# Altium PCB YGL_Y1.PcbDoc (part 1 of 2)
Units mm, origin at the board's own origin, x right, y up, seen from the top; angles counter-clockwise.
Board outline 70 x 42.24 mm, 4 copper layers (Top Layer 1, layer1, layer2, Bottom Layer 1), stack 0.603 mm thick; 162 components, 114 nets, 466 pads, 244 vias.
Unrouted connection lines stored in the file: 91.
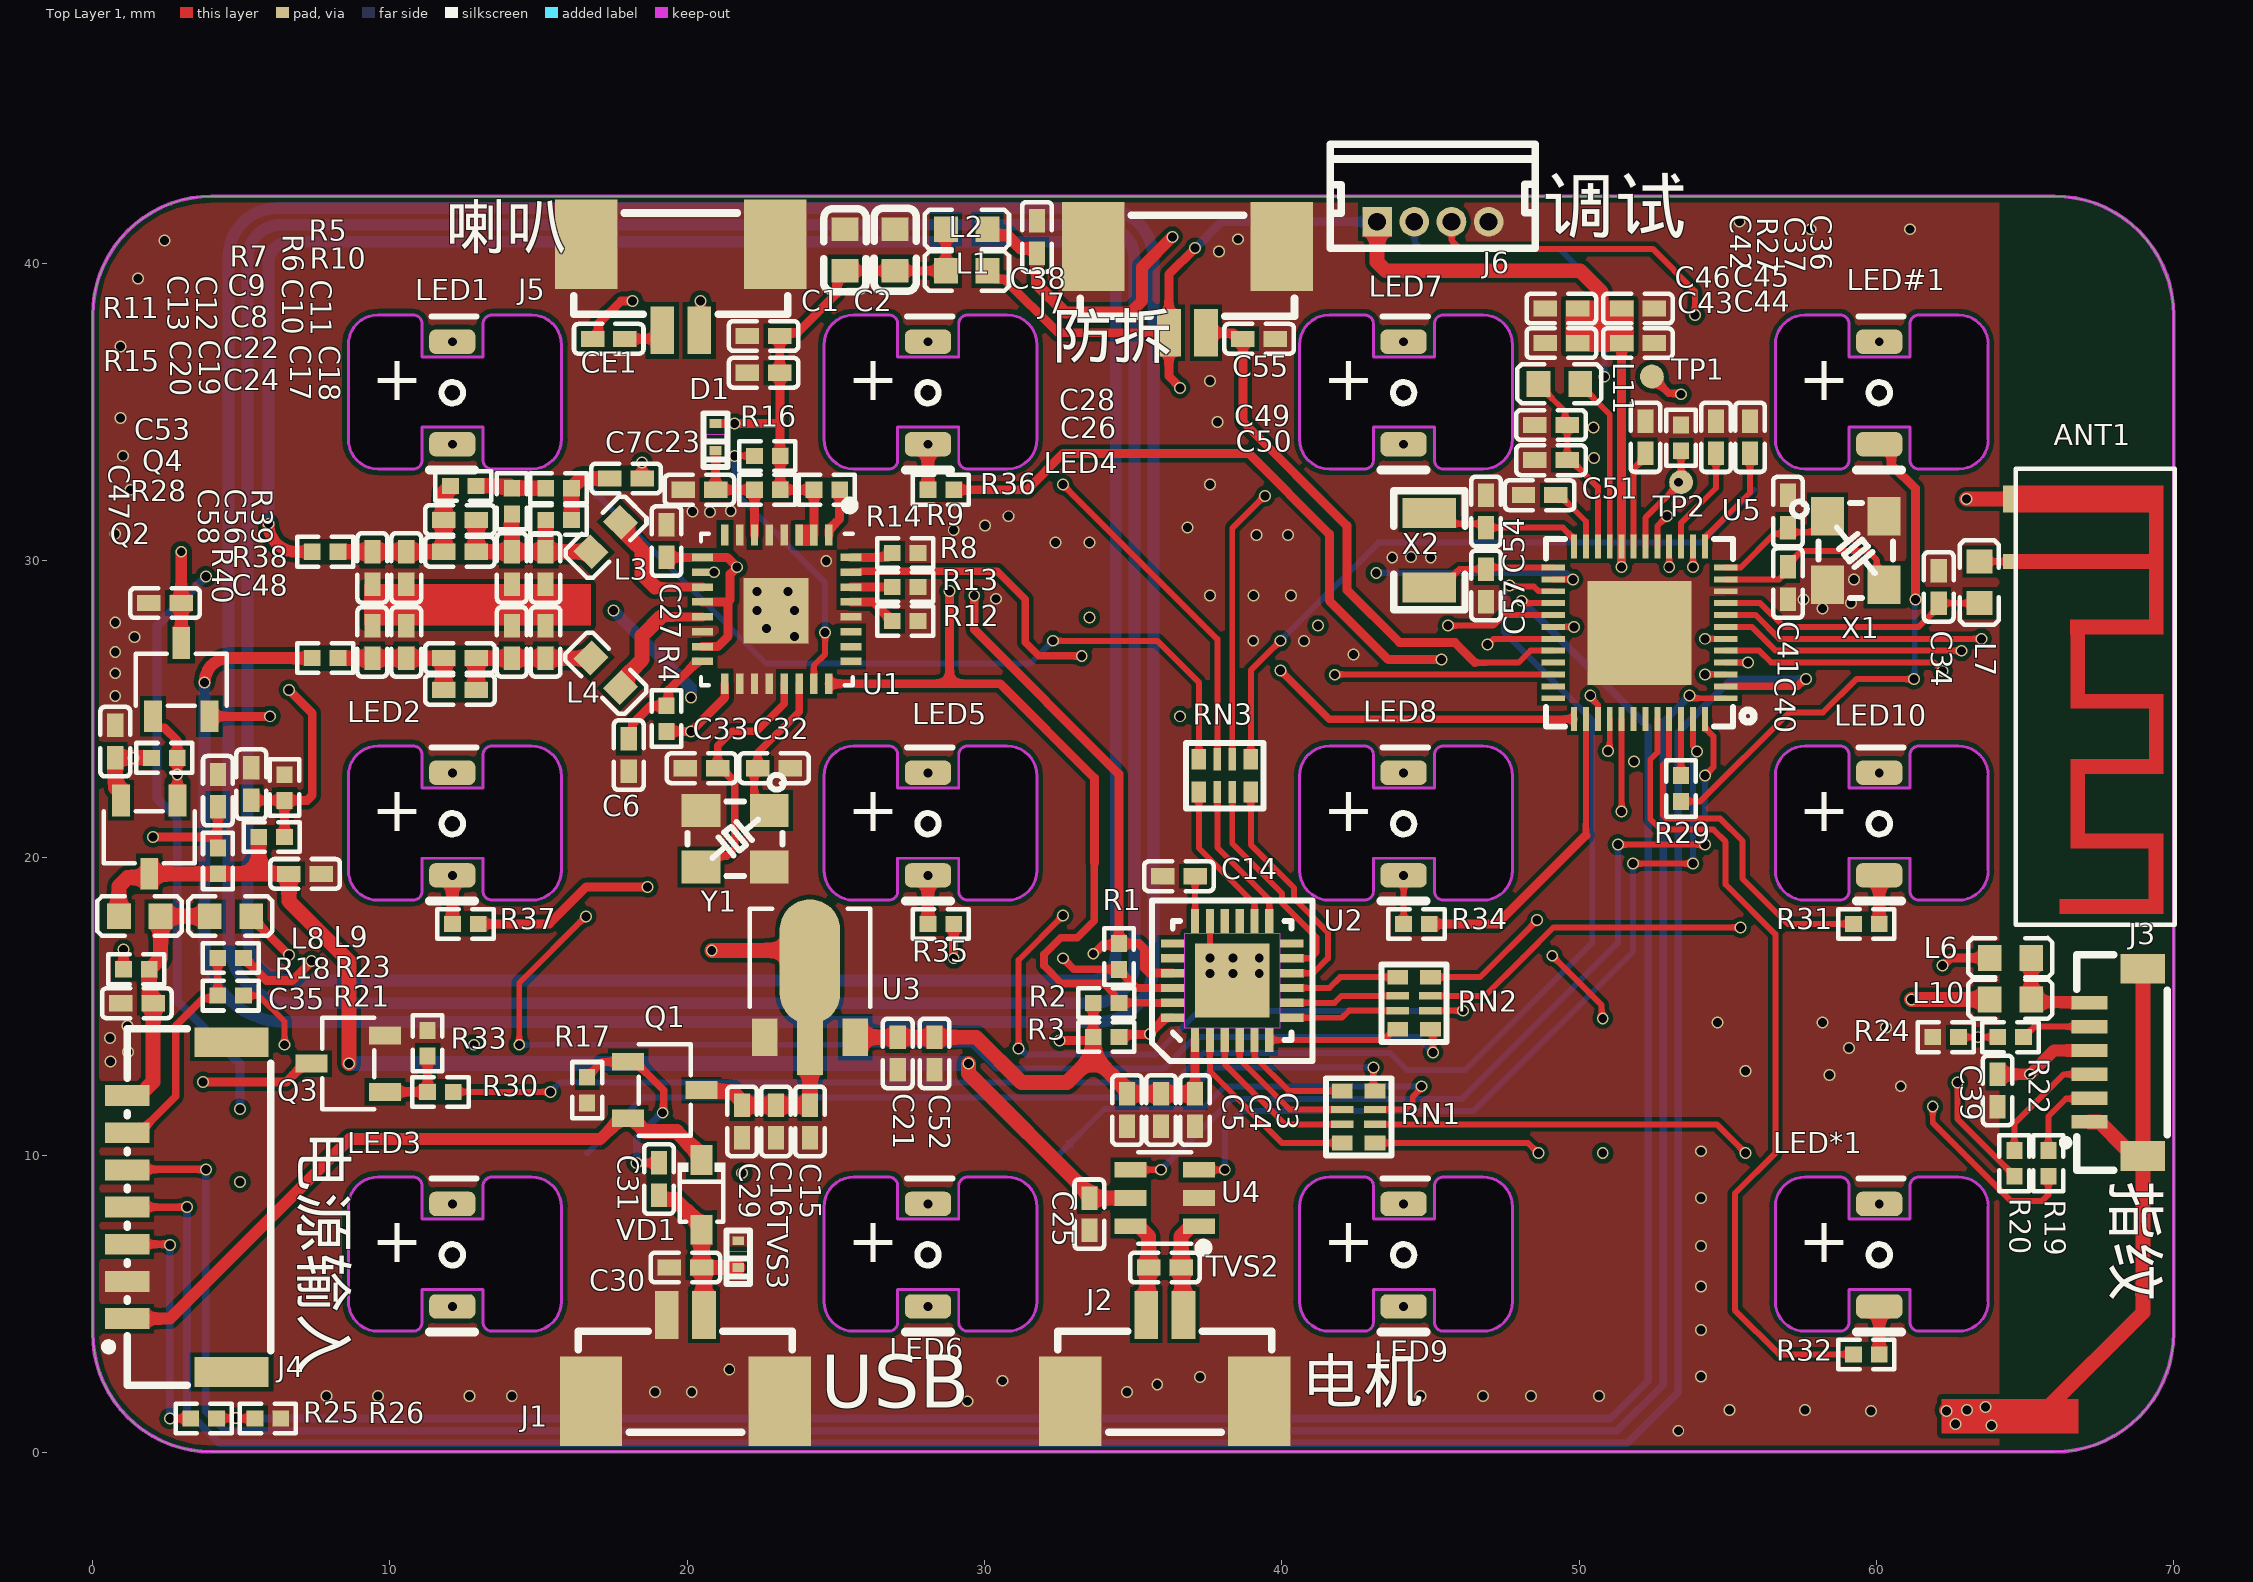
[diagram p0: Top Layer 1 view]
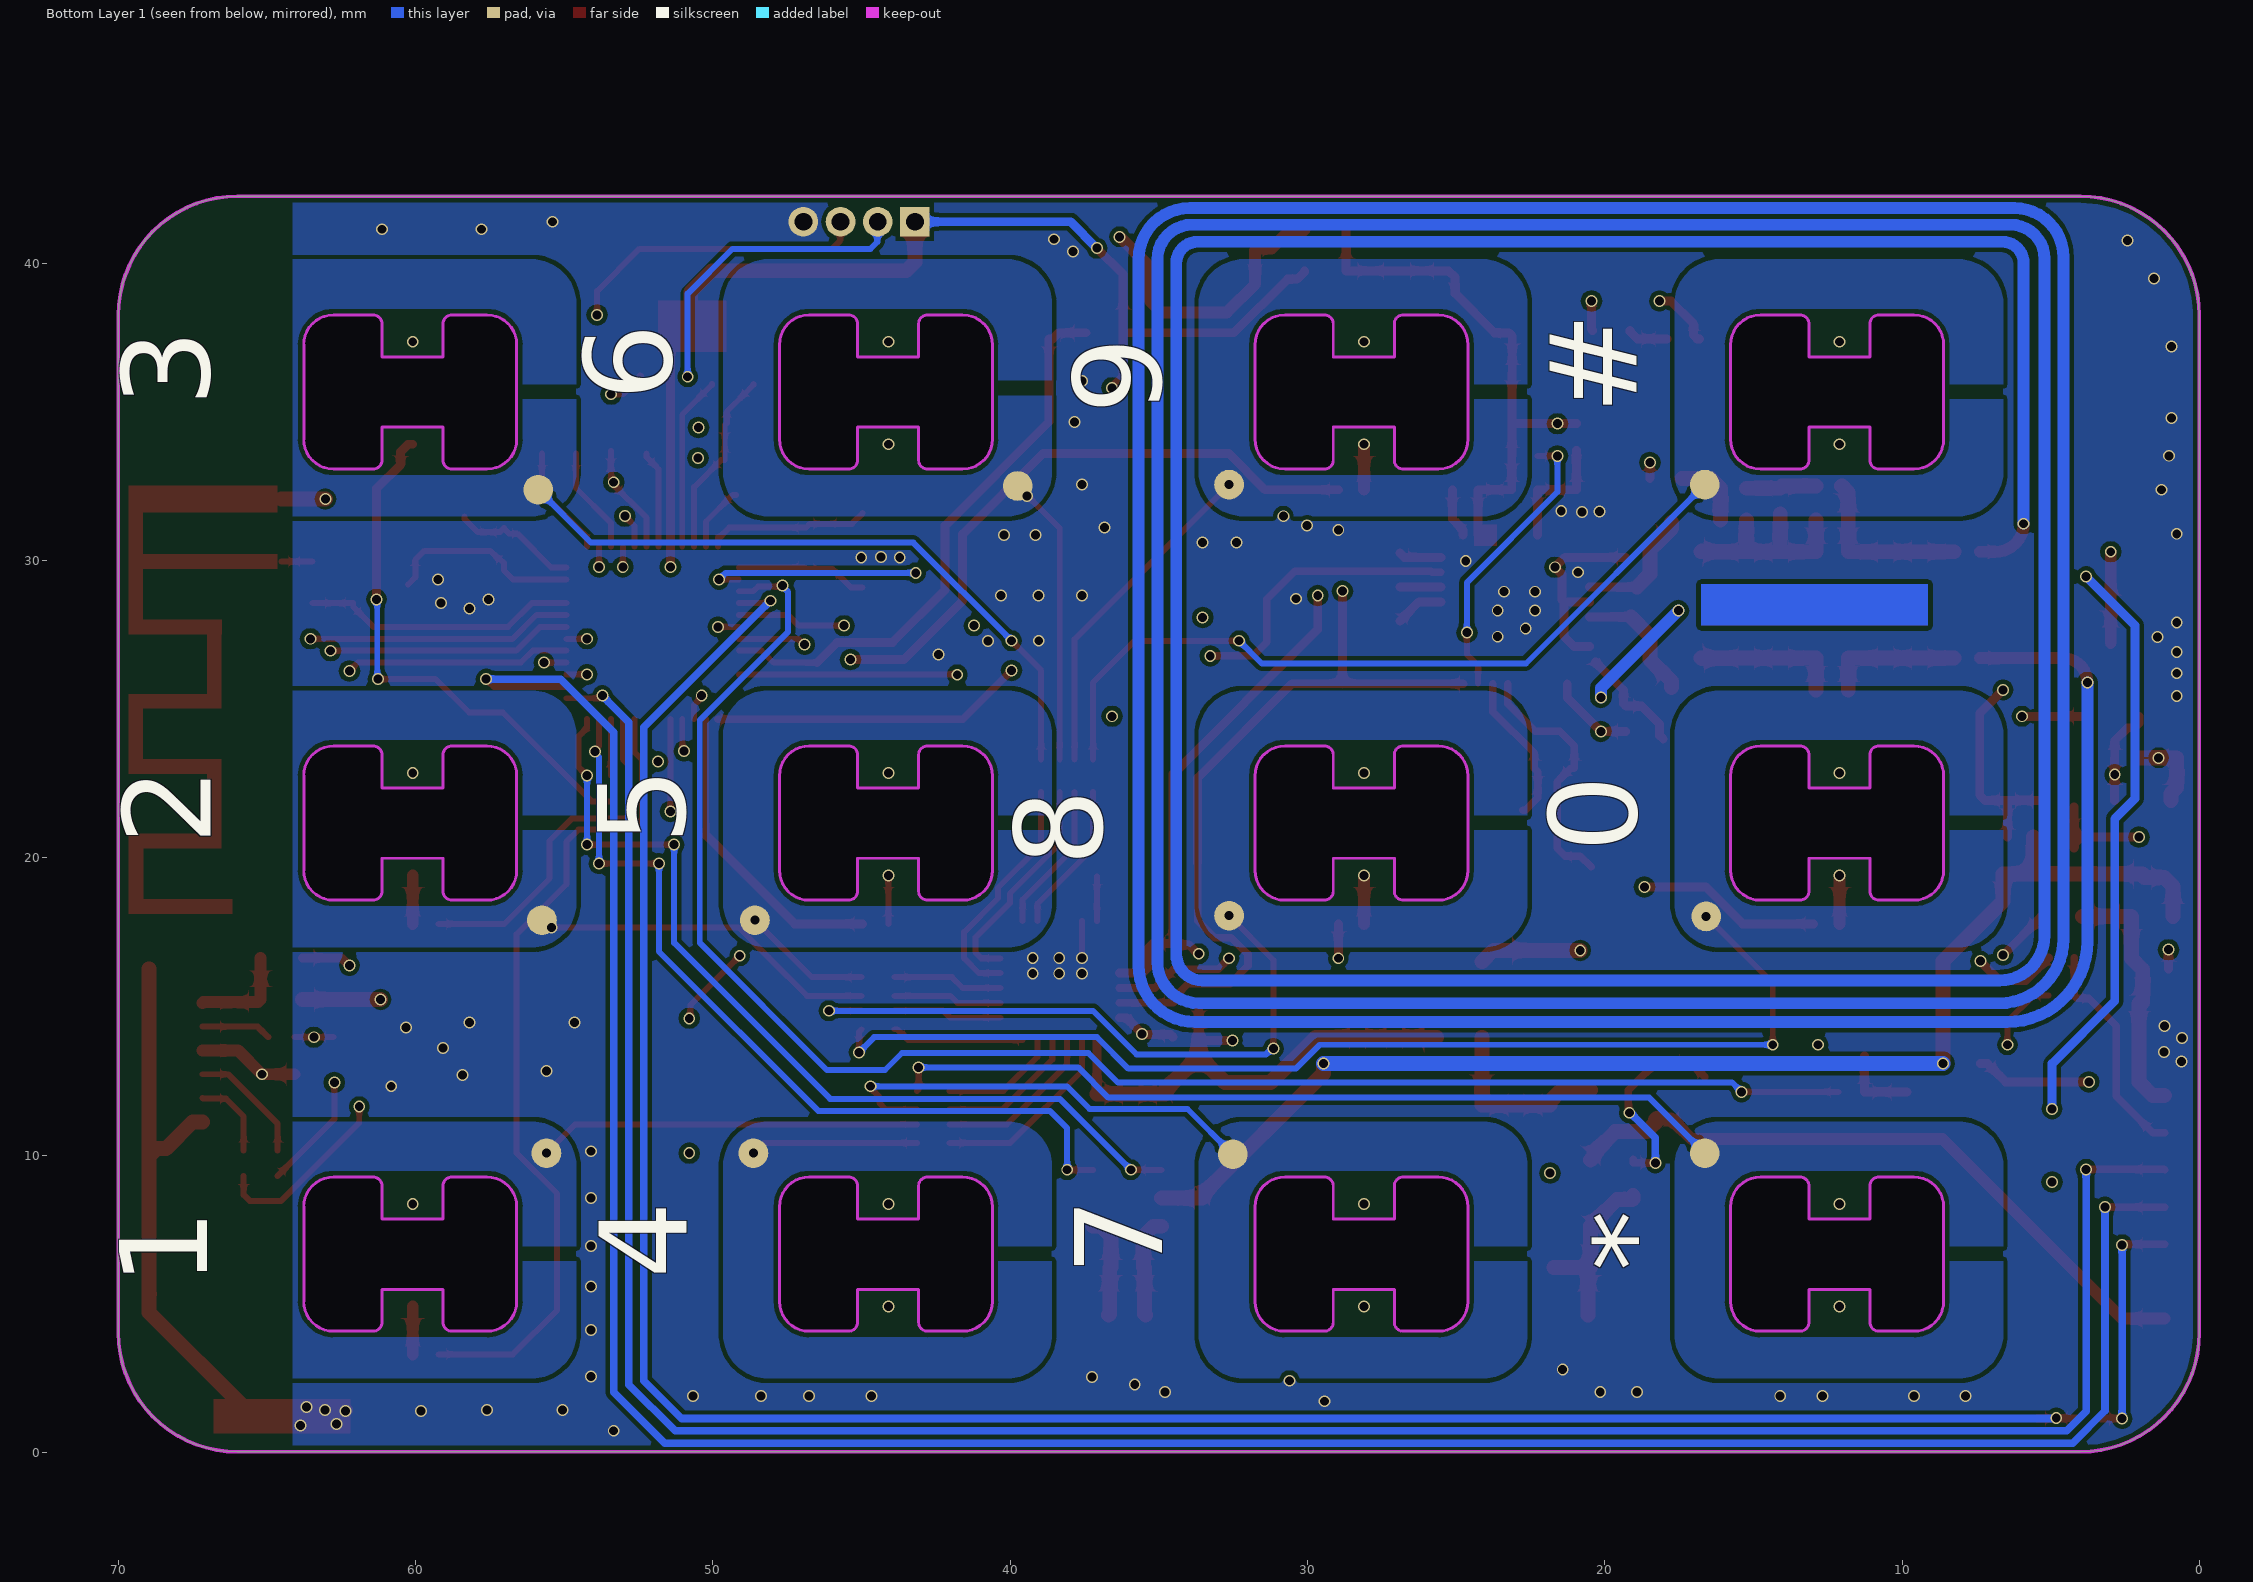
[diagram p1: Bottom Layer 1 view, seen from below]
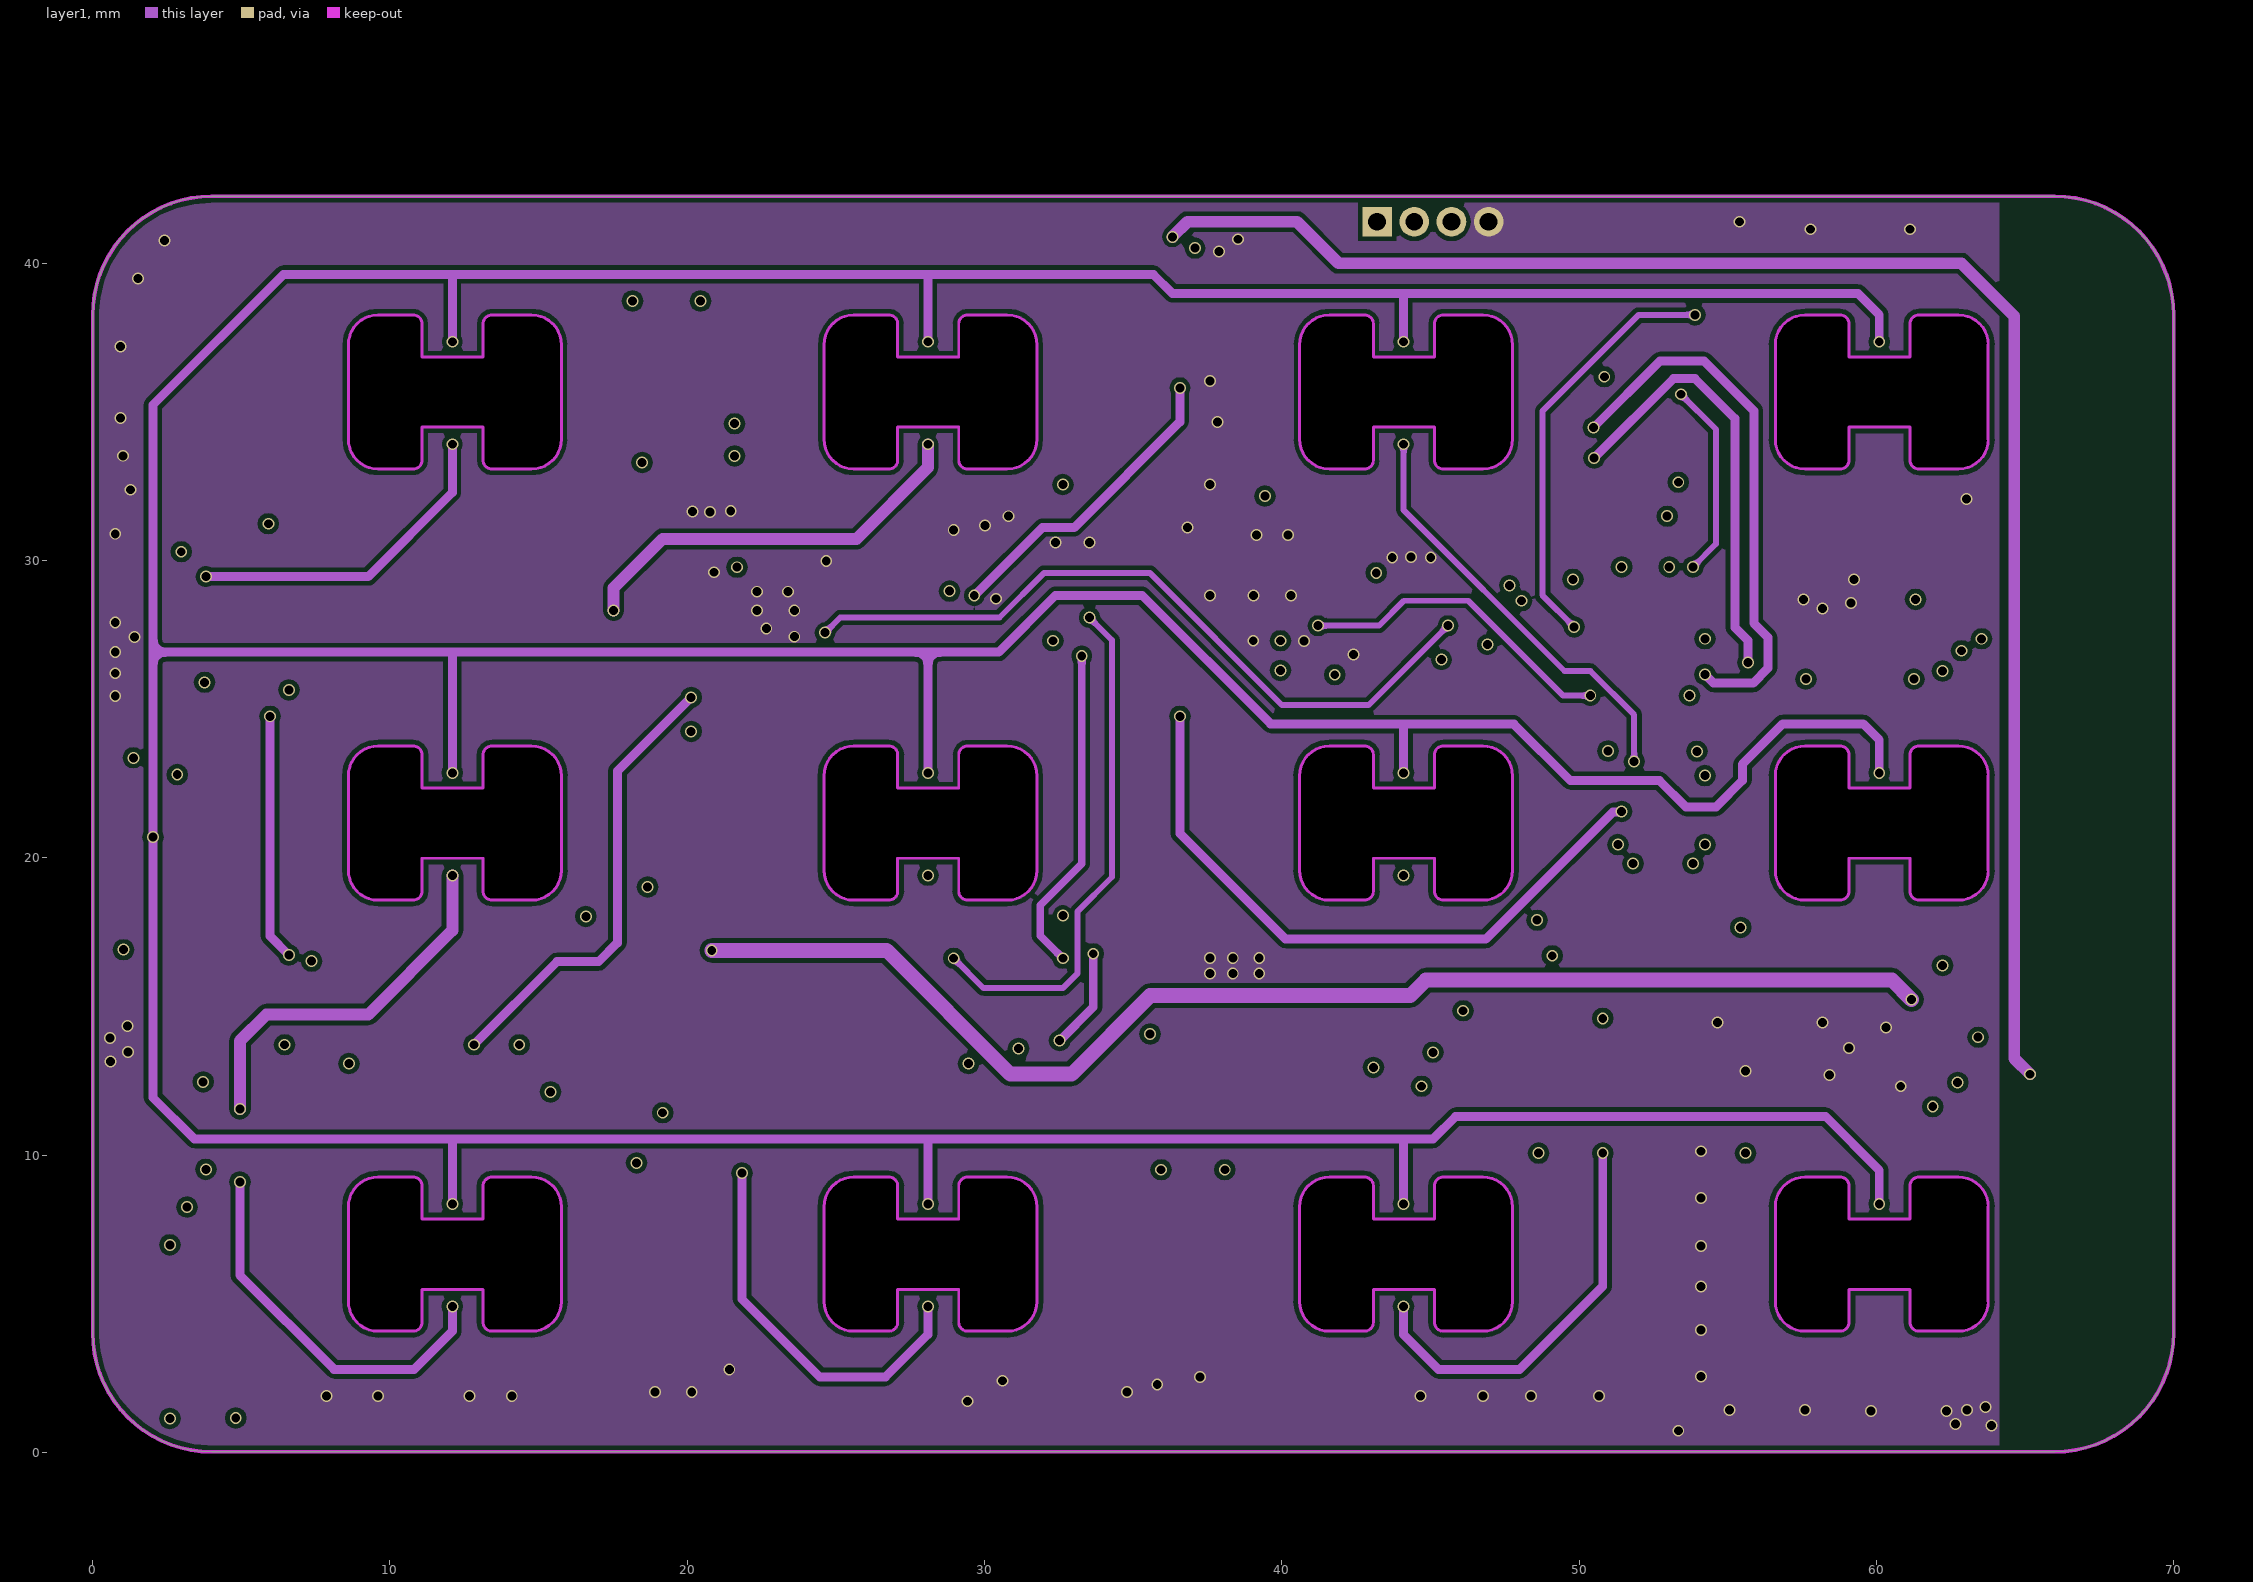
[diagram p2: layer1]
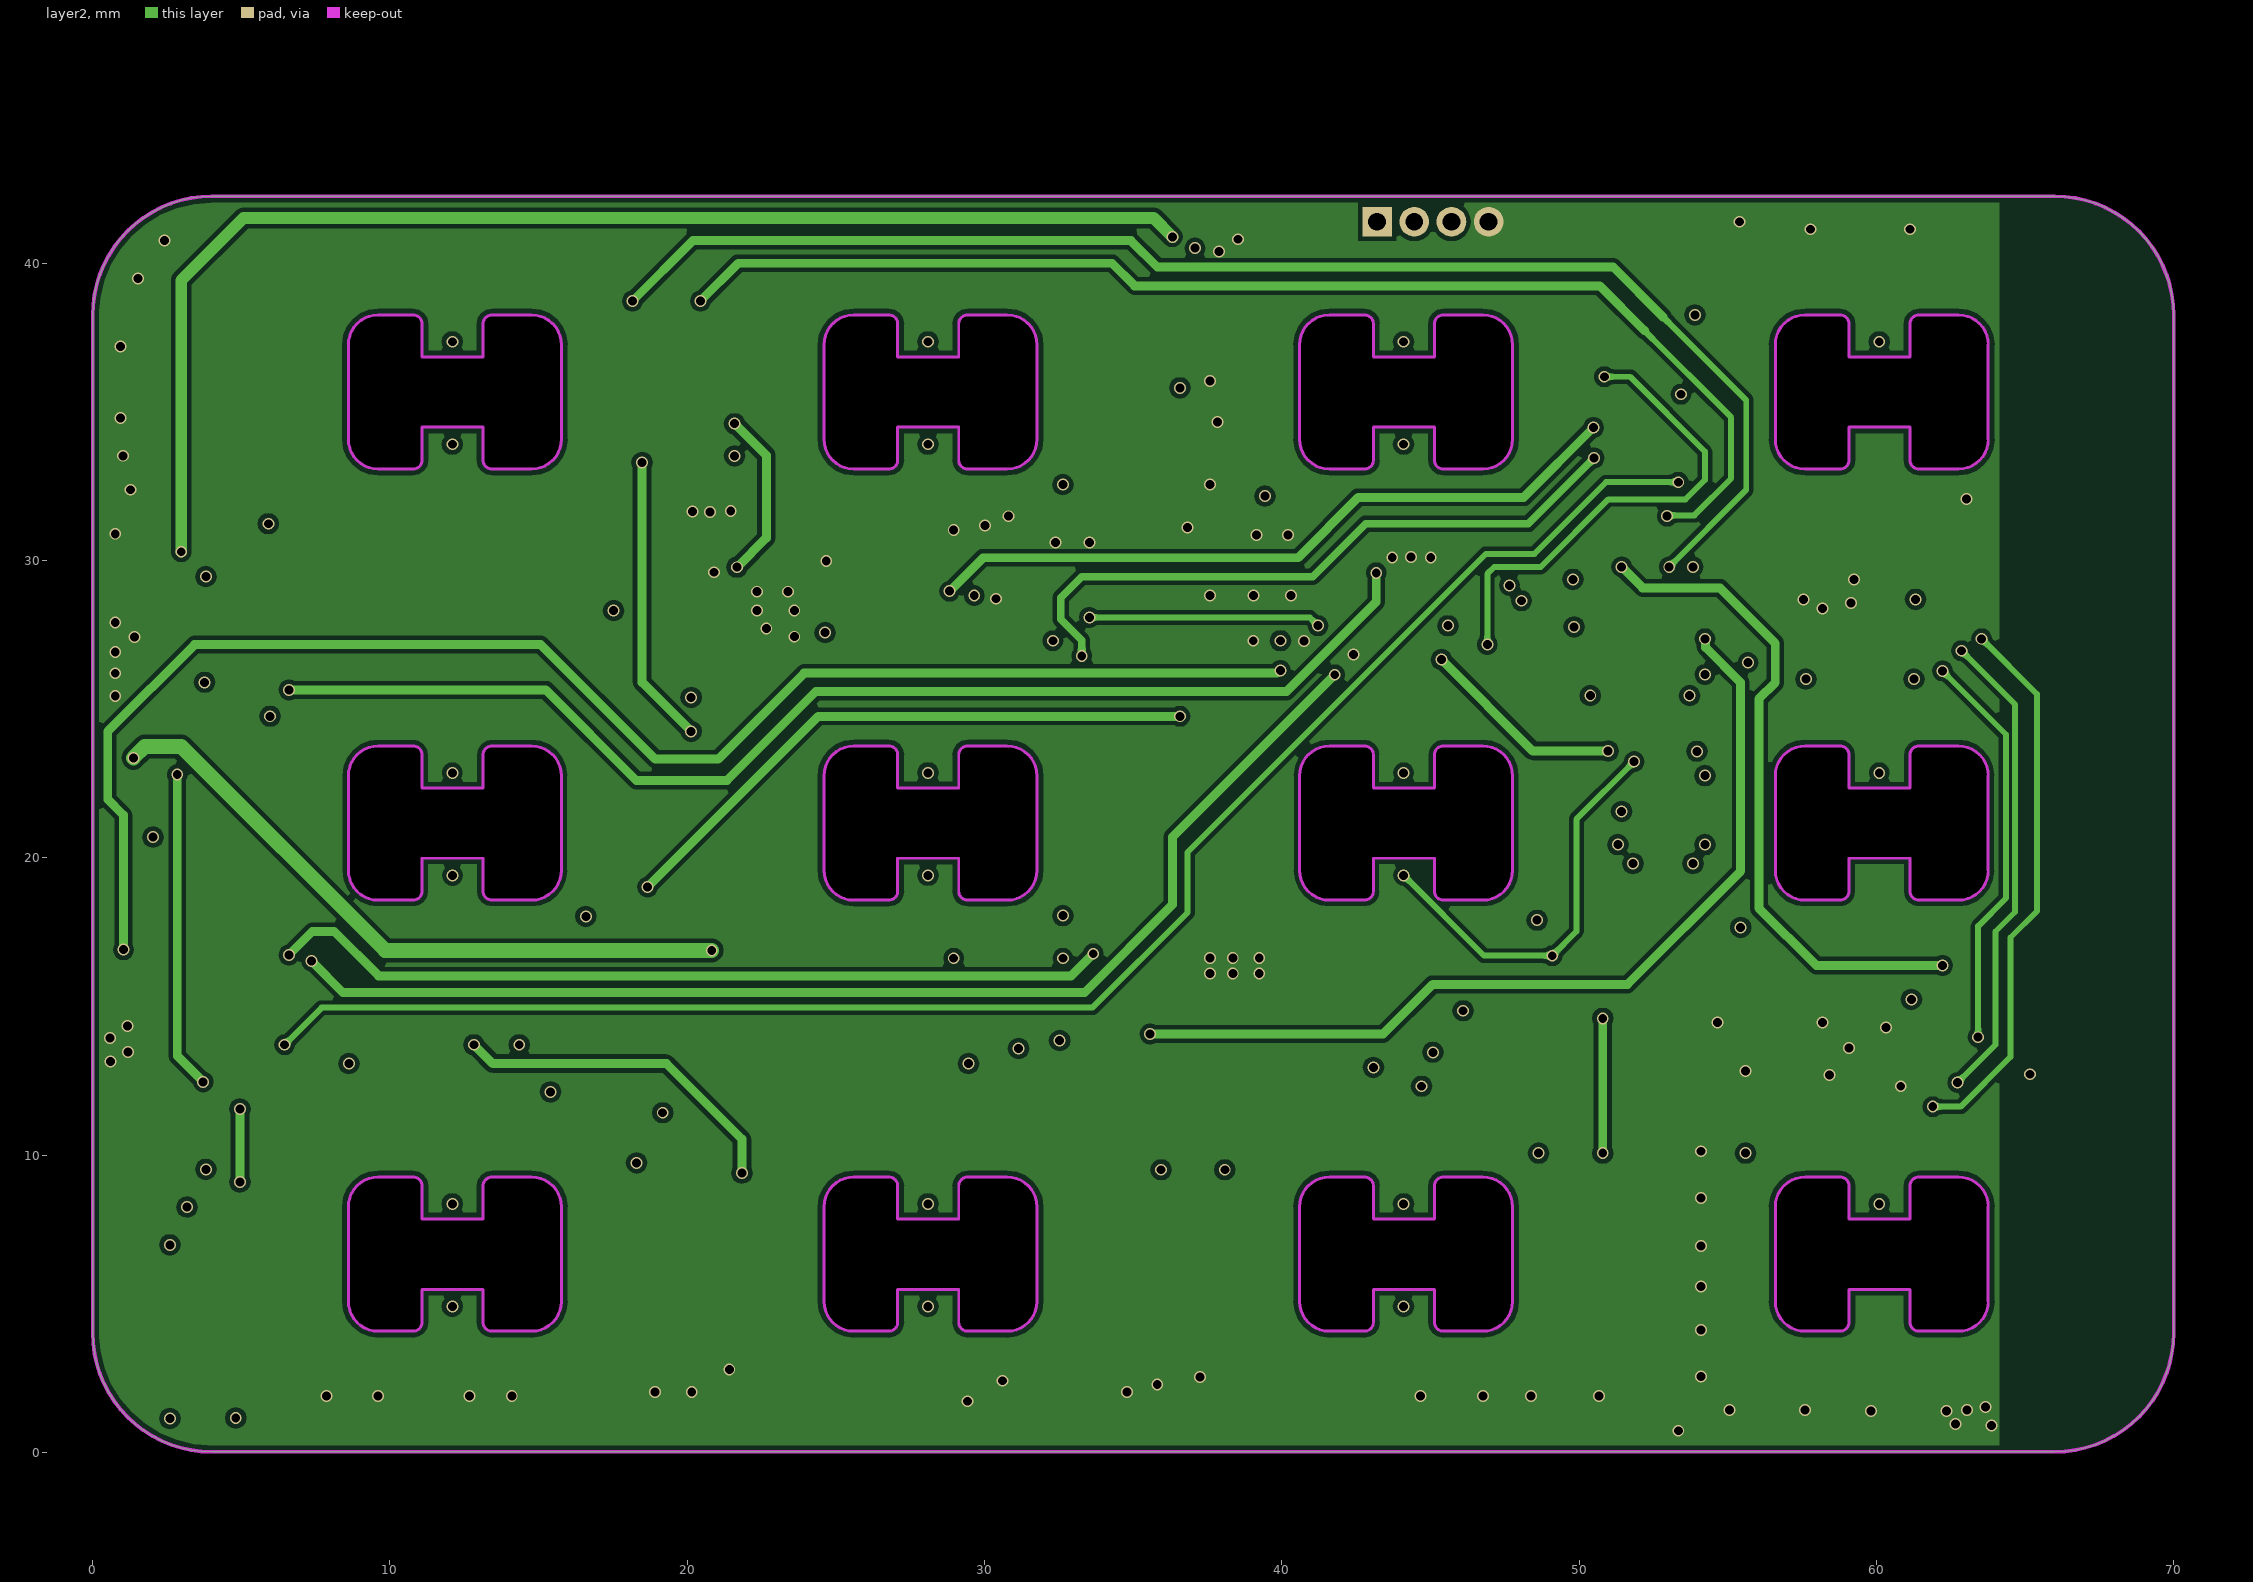
[diagram p3: layer2]

## Layer stack, top to bottom
Top Solder: solder mask 0.0102, Solder Resist, Dk 3.5
Top Layer 1: signal copper 0.035
Dielectric 2: prepreg 0.0711, PP-006, Dk 4.1
layer1: signal copper 0.0356
Dielectric 1: dielectric 0.32, FR-4, Dk 4.8
layer2: signal copper 0.0356
Dielectric 3: prepreg 0.0711, PP-006, Dk 4.1
Bottom Layer 1: signal copper 0.035
Bottom Solder: solder mask 0.0102, Solder Resist, Dk 3.5

## Board outline
0.003,4.022 0.003,38.259 cw(c4.003,38.259) 4.003,42.259 66.003,42.259 cw(c66.003,38.259) 70.003,38.259 70.003,4.022 cw(c66.003,4.022) 66.003,0.022 4.003,0.022 cw(c4.003,4.022)

## Design rules (kind name [scope] priority, off if disabled: settings)
Clearance [All] p1: gap=0.152 ignorepadtopadclearanceinfootprint=TRUE except(0: SMDPad-Hole Fill-Text Fill-Hole; 0.1: Arc-Arc Arc-Track Arc-SMDPad Arc-THPad Arc-Via Track-Track Track-SMDPad Track-THPad Track-Via SMDPad-SMDPad SMDPad-THPad SMDPad-Via THPad-THPad THPad-Via Via-Via)
ComponentClearance [All] p1: gap=0 collisioncheckmode=3 verticalgap=0 showdistances=FALSE
HoleSize [All] p1: absolutevalues=TRUE maxlimit=10 minlimit=0.025 maxpercent=80.000 minpercent=20.000
HoleToHoleClearance [All] p1: gap=0 allowstackedmicrovias=TRUE
MinimumSolderMaskSliver [All] p1: minsoldermaskwidth=0
PolygonConnect [All] p1: connectstyle=Direct reliefconductorwidth=0.254 reliefentries=4 polygonreliefangle="90 Angle" airgapwidth=0.254
RoutingVias [All] p1: holewidth=0.711 width=1.27 viastyle="Through Hole" minholewidth=0.3 minwidth=0.4 maxholewidth=99 maxwidth=99
SilkToSilkClearance [All] p1: silktosilkclearance=0
SilkToSolderMaskClearance [IsPad] p1: minsilkscreentomaskgap=0 clearancetoexposedcopper=TRUE
SolderMaskExpansion [All] p1: expansion=0.102 istentingtop=FALSE
Width [All] p1: maxlimit=2 minlimit=0.15 preferedwidth=0.254
24 further rules are at their usual default settings.

## Classes and differential pairs
component class YGL_Y1: ANT1 C1 C2 C3 C4 C5 C6 C7 C8 C9 C10 C11 C12 C13 C14 C15 C16 C17 C18 C19 C20 C21 C22 C23 C24 C25 C26 C27 C28 C29 C30 C32 C33 C34 C35 C36 C37 C38 C39 C40 C41 C42 C43 C44 C45 C46 C47 C48 C49 C50 C51 C52 C53 C54 C55 C56 C57 C58 CE1 D1 J1 J2 J3 J5 J6 L1 L2 L3 L4 L6 L7 L8 L9 L10 L11 LED1 LED2 LED3 LED4 LED5 LED6 LED7 LED8 LED9 LED10 LED#1 LED*1 Q1 Q2 Q3 Q4 R1 R2 R3 R4 R5 R6 R7 R8 R9 R10 R11 R12 R13 R14 R15 R16 R17 R18 R19 R20 R21 R22 R23 R24 R25 R26 R27 R28 R29 R30 R31 R32 R33 R34 R35 R36 R37 R38 R39 R40 RN1 RN2 RN3 TP1 TP2 TVS2 TVS3 U1 U2 U3 U4 U5 VD1 X1 X2 Y1

## Components (designator, comment, footprint, x,y, rotation, side; value= is the part's Value field where it differs from the comment)
ANT1 "S＆ANT" ANT1206,SGM3157Y 74.681,26.273 r270 top
C1 "330uF" C0603 25.311,40.451 r90 top value=47uF
C2 "100nF" C0603 26.995,40.451 r270 top value=4.7uF
C3 "10uF/10V" C0402 37.085,11.52 r90 top
C4 "100nF/16V" C0402 35.942,11.52 r90 top
C5 "100nF/16V" C0402 34.799,11.52 r90 top
C6 "1nF" C0402 18.034,23.458 r270 top
C7 "1nF" C0402 17.944,32.766 r180 top value=15PF
C8 "10pF" C0402 12.356,30.3 r180 top value=68pF
C9 "27pF" C0402 12.356,31.369 r180 top value=24pF
C10 "270pF" C0402 14.101,29.755 r90 top value=200pF
C11 "43pF" C0402 15.24,29.755 r90 top value=150pF
C12 "100pF" C0402 10.551,29.755 r90 top value=200pF
C13 "6pF" C0402 9.408,29.755 r90 top value=DNP
C14 "5pF/5%" C0402 36.54,19.385 r0 top
C15 "1uF/16V" C0402 24.13,11.139 r270 top
C16 "47uF/10V" C0402 22.987,11.139 r270 top
C17 "270pF" C0402 14.101,27.268 r90 top value=200pF
C18 "43pF" C0402 15.24,27.268 r90 top value=150pF
C19 "100pF" C0402 10.551,27.268 r90 top value=200pF
C20 "6pF" C0402 9.408,27.268 r90 top value=DNP
C21 "4.7uF/10V" C0402 27.083,13.425 r90 top
C22 "27pF" C0402 12.356,26.723 r180 top value=68pF
C23 "Cap" C0402 20.41,32.385 r0 top value=0.22uF
C24 "12pF" C0402 12.356,25.654 r180 top value=24pF
C25 "1uF" C0402 33.528,8.015 r270 top
C26 "100nF" C0402 22.569,36.322 r0 top value=0.1uF
C27 "100nF" C0402 19.304,30.656 r270 top value=1uF
C28 "100pF" C0402 22.569,37.56 r0 top
C29 "1uF/16V/20%" C0402 21.844,11.139 r270 top
C30 "100nF/16V" C0402 19.939,6.223 r180 top
C31 "4.7uF/10V/20%" C0402 19.05,9.196 r90 top
C32 "12pF" C0402 22.921,23.018 r180 top
C33 "12pF" C0402 20.482,23.018 r0 top
C34 "NC" C0402 62.101,29.117 r270 top value=0.8pF
C35 "NC" C0402 1.487,15.113 r180 top
C36 "1uF" C0402 55.753,34.151 r90 top value=0.8pF
C37 "1uF" C0402 54.61,34.151 r90 top value=0.8pF
C38 "104" C0402 31.766,40.894 r270 top
C39 "106" C0402 64.083,12.178 r270 top
C40 "" C0402 57.026,29.244 r90 top value=12PF
C41 "" C0402 57.026,31.65 r270 top value=12PF
C42 "1uF" C0402 52.234,34.151 r90 top
C43 "10uF/16V/10%" C0402 49.406,37.318 r180 top
C44 "100nF/16V/10%" C0402 51.98,37.318 r0 top
C45 "100nF/16V/10%" C0402 51.98,38.481 r0 top
C46 "" C0402 49.406,38.481 r0 top value=2.2uF
C47 "1uF/16V" C0402 0.762,23.913 r90 top
C48 "1uF/16V" C0402 7.149,19.466 r0 top
C49 "103" C0402 49.059,34.563 r0 top value=0.8pF
C50 "10uF" C0402 49.059,33.38 r0 top value=0.8pF
C51 "2.2uF/16V" C0402 48.678,32.202 r180 top
C52 "1uF/16V" C0402 28.321,13.425 r270 top
C53 "1uF/16V" C0402 2.437,28.575 r180 top
C54 "" C0402 46.871,31.657 r270 top value=6PF
C55 "104" C0402 39.242,37.464 r0 top
C56 "100nF" C0402 5.337,22.481 r90 top
C57 "" C0402 46.871,29.17 r90 top value=6PF
C58 "2.2uF" C0402 4.212,22.262 r90 top
CE1 "10uF/6V" C0402 17.362,37.464 r0 top
D1 "RB521" SOD923 20.955,34.158 r270 top
J1 "CON2 SMD 1.25mm" "SMD 1.25 2P" 19.939,3.175 r180 top
J2 "CON2 SMD 1.25mm" "SMD 1.25 2P" 36.068,3.175 r180 top
J3 "6Pin-SMD 0.8mm" "SMD 0.80 6P" 68.069,13.923 r90 top
J4 "CON5 SMD 1.25mm" "SMD 1.25 7P" 2.921,8.255 r90 top
J5 "SPK-SMD 1.25mm" "SMD 1.25 2P" 19.784,39.196 r0 top
J6 "CON4" "1.25 4P" 45.085,41.402 r0 top
J7 "SPK-SMD 1.25mm" "SMD 1.25 2P" 36.83,39.116 r0 top (schematic designator J5)
L1 "0" L0603 29.402,41.151 r180 top
L2 "NC" L0603 29.402,39.751 r180 top
L3 "470nH / shielded (1210)" L0603 17.259,30.795 r225 top value="470nH / shielded"
L4 "470nH / shielded (1210)" L0603 17.259,26.228 r135 top value="470nH / shielded"
L6 "0" L0603 64.516,16.637 r0 top
L7 "0R" L0603 63.473,29.272 r90 top value=3.9nH
L8 "NC" L0603 1.586,18.034 r0 top
L9 "NC" L0603 4.637,18.034 r0 top
L10 "NC" L0603 64.516,15.24 r0 top
L11 "10uH/50mA" L0603 49.341,35.941 r0 top value=3.9nH
LED1 "LED" LED/1206 12.1,35.64 r180 top locked
LED2 "LED" LED/1206 12.1,21.14 r180 top locked
LED3 "LED" LED/1206 12.1,6.64 r180 top locked
LED4 "LED" LED/1206 28.1,35.64 r180 top locked
LED5 "LED" LED/1206 28.1,21.14 r180 top locked
LED6 "LED" LED/1206 28.1,6.64 r180 top locked
LED7 "LED" LED/1206 44.1,35.64 r180 top locked
LED8 "LED" LED/1206 44.1,21.14 r180 top locked
LED9 "LED" LED/1206 44.1,6.64 r180 top locked
LED10 "LED" LED/1206 60.1,21.14 r180 top locked
LED#1 "LED" LED/1206 60.1,35.64 r180 top locked
LED*1 "LED" LED/1206 60.1,6.64 r180 top locked
P1 "CON1" "TEST 1" 16.637,10.07 r180 bottom
P2 "CON1" "TEST 1" 32.512,10.033 r180 bottom
P3 "CON1" "TEST 1" 48.641,10.07 r180 bottom
P4 "CON1" "TEST 1" 55.603,10.07 r180 bottom
P5 "CON1" "TEST 1" 16.591,18.034 r180 bottom
P6 "CON1" "TEST 1" 32.639,18.058 r180 bottom
P7 "CON1" "TEST 1" 48.591,17.907 r180 bottom
P8 "CON1" "TEST 1" 55.753,17.907 r180 bottom
P9 "CON1" "TEST 1" 55.88,32.385 r180 bottom
P10 "CON1" "TEST 1" 39.751,32.512 r90 bottom
P11 "CON1" "TEST 1" 32.639,32.558 r90 bottom
P12 "CON1" "TEST 1" 16.637,32.558 r90 bottom
Q1 "SI2301" SOT-23-3_L2.9-W1.6-P1.90-LS2.8-BR 19.249,12.192 r180 top
Q2 "SI2301" SOT-23-3_L2.9-W1.6-P1.90-LS2.8-BR 1.905,20.701 r90 top
Q3 "2N7002" SOT-23-3_L2.9-W1.6-P1.90-LS2.8-BR 8.601,13.081 r0 top
Q4 "SI2301" SOT-23-3_L2.9-W1.6-P1.90-LS2.8-BR 2.982,26 r270 top
R1 "10K/5%" R0402 34.525,16.685 r90 top
R2 "10K/5%" R0402 34.092,15.125 r180 top
R3 "10K/5%" R0402 34.092,13.982 r180 top
R4 "160R" R0402 19.304,24.69 r90 top value=1K
R5 "2k4" R0402 15.673,32.437 r0 top value=3.9K
R6 "16.9" R0402 14.101,32.004 r90 top
R7 "16.9" R0402 12.468,32.512 r0 top
R8 "10k" R0402 27.33,30.254 r180 top
R9 "10k" R0402 24.698,32.385 r0 top value=1k
R10 "NC" R0402 15.673,31.369 r180 top
R11 "160R" R0402 7.822,30.3 r180 top value=1R
R12 "10k" R0402 27.33,27.968 r180 top
R13 "10k" R0402 27.33,29.111 r180 top
R14 "10k" R0402 22.698,32.385 r180 top value=47k
R15 "160R" R0402 7.822,26.723 r180 top value=1R
R16 "10K/5%" R0402 22.698,33.524 r180 top
R17 "100K/5%" R0402 16.637,12.192 r90 top
R18 "1K" R0402 1.472,16.256 r0 top
R19 "100R" R0402 65.786,9.727 r270 top
R20 "100R" R0402 64.643,9.727 r270 top
R21 "NC" R0402 4.645,15.367 r0 top
R22 "100R" R0402 64.516,13.97 r0 top
R23 "10R/5%" R0402 4.645,16.637 r0 top
R24 "10K" R0402 62.333,13.97 r180 top
R25 "1K" R0402 3.735,1.143 r180 top
R26 "1K" R0402 5.894,1.143 r0 top
R27 "10K/5%" R0402 53.434,34.13 r90 top
R28 "100K" R0402 2.413,23.368 r0 top
R29 "1K" R0402 53.434,22.336 r270 top
R30 "1K/5%" R0402 11.701,12.131 r180 top
R31 "1K" R0402 59.667,17.78 r0 top
R32 "1K" R0402 59.667,3.302 r0 top
R33 "100K/5%" R0402 11.268,13.768 r90 top
R34 "1K" R0402 44.533,17.78 r180 top
R35 "1K" R0402 28.533,17.78 r180 top
R36 "1K" R0402 28.533,32.385 r180 top
R37 "1K" R0402 12.542,17.78 r180 top
R38 "15K/1%" R0402 6.021,20.701 r0 top
R39 "5.6K/1%" R0402 6.454,22.369 r90 top
R40 "1K,0805" R0402 4.212,19.899 r90 top
RN1 "1K/5%" R4D02 42.587,11.289 r270 top
RN2 "1K/5%" R4D02 44.45,15.113 r270 top
RN3 "1K/5%" R4D02 38.085,22.768 r0 top
TP1 "" "TEST 0.8" 52.451,36.195 r90 top
TP2 "" "TEST 0.8" 53.434,32.639 r90 top
TVS2 "0.1uF/0603/10V" C0402 36.068,6.223 r180 top
TVS3 "AZ5325-01F" SOD923 21.717,6.673 r270 top
U1 "SL2823" Z_QFN50P500X500X100-32N 24.765,30.861 r180 top
U2 "GTX314L" "QFN24_0.5 - U2" 38.335,15.875 r90 top
U3 "HL7602" SOT-89_L4.5-W2.5-P1.50-LS4.2-BR 24.091,16.436 r270 top
U4 "BDR6120S" SOT-23-6_L2.9-W1.6-P0.95-LS2.8-BL 36.068,8.56 r90 top
U5 "FR8018HA  QFN48" QFN48_6*6*0.75_P0.4 52.034,27.572 r180 top
VD1 "B5817WS" SOD-323_L1.8-W1.3-LS2.5-RD 20.484,8.666 r270 top
X1 "24MHz" XTAL-3225-SMT-A 59.312,30.597 r90 top
X2 "32768Hz" XTAL_FC-135$2F$3215 44.966,30.35 r90 top
Y1 "27.12MHz" XTAL-3225-SMT-A 21.868,20.647 r0 top

## Footprints (in the part's own frame and the unit in brackets; to place one, negate y for a bottom-side part, rotate by r counter-clockwise, add the part's x,y. Pads: shape width x height; smd on the part's side, far side on the other; paste and mask are expansions set on the pad)
"1.25 4P" [mm]
  rect 1x1 hole 0.6 paste+0 mask+0.05: 1(-1.875,0)
  round 1 hole 0.6 paste+0 mask+0.05: 2(-0.625,0) 3(0.625,0) 4(1.875,0)
  silkscreen extent -3.45,-0.9 3.45,2.6
ANT1206,SGM3157Y [mm]
  rect 0.9x0.5 smd mask+0.003: 1(-5.799,-10.165)
  rect 0.5x0.5 smd mask+0.003: 2(-3.699,-10.165)
  Top Layer 1 region: 3.451,-8.155 3.451,-5.015 2.951,-5.015 2.951,-8.155
  Top Layer 1 region: 3.451,-5.515 3.451,-5.015 0.75,-5.015 0.75,-5.515
  Top Layer 1 region: 1.251,-8.155 1.251,-5.015 0.75,-5.015 0.75,-8.155
  Top Layer 1 region: 1.25,-8.156 1.25,-7.656 -1.75,-7.656 -1.75,-8.156
  Top Layer 1 region: -5.349,-10.031 -5.349,-5.012 -6.248,-5.012 -6.248,-10.031
  Top Layer 1 region: -3.449,-10.033 -3.449,-5.265 -3.95,-5.265 -3.95,-10.033
  Top Layer 1 region: -1.249,-8.158 -1.249,-5.018 -1.749,-5.018 -1.749,-8.158
  Top Layer 1 region: 5.951,-8.155 5.951,-5.015 5.451,-5.015 5.451,-8.155
  Top Layer 1 region: 3.25,-7.655 3.25,-8.155 5.951,-8.155 5.951,-7.655
  Top Layer 1 region: 8.152,-5.516 8.152,-5.017 5.452,-5.017 5.452,-5.516
  Top Layer 1 region: 8.153,-8.514 8.153,-5.014 7.654,-5.014 7.654,-8.514
  Top Layer 1 lines w0.5: -1.499,-5.265 -5.999,-5.265
  silkscreen extent -6.82,-9.99 8.53,-4.64
C0402 [mm]
  rect 0.79x0.54 smd paste-100 mask+0.051: 1(-0.545,0) 2(0.545,0)
  silkscreen extent -1.17,-0.5 1.17,0.5
C0603 [mm]
  rect 0.8x0.9 smd: 1(-0.7,0) 2(0.7,0)
  silkscreen extent -1.41,-0.71 1.39,0.72
L0603 [mm]
  rect 0.8x0.864 smd paste-100 mask+0.051: 1(-0.7,0) 2(0.7,0)
  silkscreen extent -1.42,-0.65 1.41,0.67
LED/1206 [mm]
  rrect50% 1.555x0.815 smd: 1(0,-1.724) 2(0,1.724)
  Keep-Out Layer board cut-out: -2.666,-2.628 -3.049,-2.552 -3.373,-2.336 -3.59,-2.011 -3.666,-1.628 -3.666,-1.628 -3.666,1.56 -3.59,1.943 -3.373,2.267 -3.049,2.484 -2.666,2.56 -2.666,2.56 -1.336,2.56 -1.221,2.537 -1.124,2.472 -1.059,2.375 -1.036,2.26 -1.036,2.26 -1.036,1.15 1.017,1.15 1.017,2.26 1.04,2.375 1.105,2.472 1.202,2.537 1.317,2.56 1.317,2.56 2.497,2.56 2.88,2.484 3.204,2.267 3.421,1.943 3.497,1.56 3.497,1.56 3.497,-1.628 3.421,-2.011 3.204,-2.336 2.88,-2.552 2.497,-2.628 2.497,-2.628 1.317,-2.628 1.202,-2.606 1.105,-2.541 1.04,-2.443 1.017,-2.328 1.017,-2.328 1.017,-1.218 -1.036,-1.218 -1.036,-2.328 -1.059,-2.443 -1.124,-2.541 -1.221,-2.606 -1.336,-2.628 -1.336,-2.628
  Keep-Out Layer lines w0.1: 3.497,1.56 ccw(c2.497,1.56) 2.497,2.56 1.317,2.56 ccw(c1.317,2.26) 1.017,2.26 1.017,1.15 -1.036,1.15 -1.036,2.26 ccw(c-1.336,2.26) -1.336,2.56 -2.666,2.56 ccw(c-2.666,1.56) -3.666,1.56 -3.666,-1.628 ccw(c-2.666,-1.628) -2.666,-2.628 -1.336,-2.628 ccw(c-1.336,-2.328) -1.036,-2.328 -1.036,-1.218 1.017,-1.218 1.017,-2.328 ccw(c1.317,-2.328) 1.317,-2.628 2.497,-2.628 ccw(c2.497,-1.628) 3.497,-1.628 3.497,1.56
  silkscreen extent -0.82,-2.57 0.76,2.59
"QFN24_0.5 - U2" [mm] "GTX314"
  rect 0.8x0.28 smd: 1(-2,1.25) 2(-2,0.75) 3(-2,0.25) 4(-2,-0.25) 5(-2,-0.75) 6(-2,-1.25) 13(2,-1.25) 14(2,-0.75) 15(2,-0.25) 16(2,0.25) 17(2,0.75) 18(2,1.25)
  rect 0.28x0.8 smd: 7(-1.25,-2) 8(-0.75,-2) 9(-0.25,-2) 10(0.25,-2) 11(0.75,-2) 12(1.25,-2) 19(1.25,2) 20(0.75,2) 21(0.25,2) 22(-0.25,2) 23(-0.75,2) 24(-1.25,2)
  rect 2.5x2.5 smd: 25(0,0)
  Top Layer 1 keep-out region: -1.6,1.6 1.6,1.6 1.6,-1.6 -1.6,-1.6 -1.6,1.6
  silkscreen extent -2.7,-2.7 2.7,2.7
QFN48_6*6*0.75_P0.4 [mm] "FR8018HA"
  rect 0.8x0.2 smd: 1(-2.9,2.2) 2(-2.9,1.8) 3(-2.9,1.4) 4(-2.9,1) 5(-2.9,0.6) 6(-2.9,0.2) 7(-2.9,-0.2) 8(-2.9,-0.6) 9(-2.9,-1) 10(-2.9,-1.4) 11(-2.9,-1.8) 12(-2.9,-2.2) 25(2.9,-2.2) 26(2.9,-1.8) 27(2.9,-1.4) 28(2.9,-1) 29(2.9,-0.6) 30(2.9,-0.2) 31(2.9,0.2) 32(2.9,0.6) 33(2.9,1) 34(2.9,1.4) 35(2.9,1.8) 36(2.9,2.2)
  rect 0.2x0.8 smd: 13(-2.2,-2.9) 14(-1.8,-2.9) 15(-1.4,-2.9) 16(-1,-2.9) 17(-0.6,-2.9) 18(-0.2,-2.9) 19(0.2,-2.9) 20(0.6,-2.9) 21(1,-2.9) 22(1.4,-2.9) 23(1.8,-2.9) 24(2.2,-2.9) 37(2.2,2.9) 38(1.8,2.9) 39(1.4,2.9) 40(1,2.9) 41(0.6,2.9) 42(0.2,2.9) 43(-0.2,2.9) 44(-0.6,2.9) 45(-1,2.9) 46(-1.4,2.9) 47(-1.8,2.9) 48(-2.2,2.9)
  rect 3.5x3.5 smd: 49(0,0)
  silkscreen extent -3.85,-3.15 3.15,3.15, body extent -3,-3 3,3, height 0.8
R4D02 [mm] "排阻"
  rect 0.5x0.7 smd mask+0.025: 1(-0.875,-0.55) 4(0.875,-0.55) 5(0.875,0.55) 8(-0.875,0.55)
  rect 0.25x0.75 smd paste-0.025: 2(-0.25,-0.55) 3(0.25,-0.55) 6(0.25,0.55) 7(-0.25,0.55)
  silkscreen extent -1.3,-1.1 1.3,1.1
R0402 [mm]
  rect 0.566x0.54 smd paste-100 mask+0.051: 1(-0.433,0) 2(0.433,0)
  silkscreen extent -0.94,-0.5 0.94,0.5
"SMD 0.80 6P" [mm]
  rect 0.45x1.208 smd: 1(-2.8,0.898) 2(-2,0.898) 3(-1.2,0.898) 4(-0.4,0.898) 5(0.4,0.898) 6(1.2,0.898)
  rect 1x1.5 smd: 7(2.35,-0.898) 8(-3.95,-0.898)
  silkscreen extent -4.43,-1.72 2.83,1.8
"SMD 1.25 2P" [mm]
  rect 0.8x1.6 smd paste+0 mask+0.05: 1(-0.625,-1.45) 2(0.625,-1.45)
  rect 2.1x3 smd paste+0 mask+0.05: 3(-3.175,1.45) 3(3.175,1.45)
  silkscreen extent -3.6,-0.9 3.6,2.5
"SMD 1.25 7P" [mm]
  rect 0.7x1.5 smd paste+0 mask+0.05: 1(-3.75,1.75) 2(-2.5,1.75) 3(-1.25,1.75) 4(0,1.75) 5(1.25,1.75) 6(2.5,1.75) 7(3.75,1.75)
  rect 1x2.5 smd paste+0 mask+0.05: 8(-5.55,-1.75) 8(5.55,-1.75)
  silkscreen extent -6,-3.08 6,2.51
SOD923 [mm]
  rect 0.3x0.4 smd mask+0.025: 1(-0.45,0) 2(0.45,0)
  Top Layer 1 keep-out region: -0.1,-0.3 -0.1,0.3 0.1,0.3 0.1,-0.3 -0.1,-0.3
  silkscreen extent -0.8,-0.4 1,0.4
SOD-323_L1.8-W1.3-LS2.5-RD [mm]
  rect 1x0.75 smd: 1(1.173,0) 2(-1.173,0)
  silkscreen extent -1.08,-0.8 0.9,0.8
SOT-23-3_L2.9-W1.6-P1.90-LS2.8-BR [mm]
  rect 1.07x0.6 smd: 1(1.235,-0.95) 2(1.235,0.95) 3(-1.235,0)
  silkscreen extent -0.88,-1.54 0.88,1.54
SOT-23-6_L2.9-W1.6-P0.95-LS2.8-BL [mm]
  rect 0.532x1.072 smd: 1(-0.95,-1.149) 2(0,-1.149) 3(0.95,-1.149) 4(0.95,1.149) 5(0,1.149) 6(-0.95,1.149)
  silkscreen extent -1.82,-1.45 1.54,0.89
SOT-89_L4.5-W2.5-P1.50-LS4.2-BR [mm]
  rect 1.27x0.864 smd: 1(2.466,-1.485) 3(2.466,1.563)
  oval 4.2x2.032 smd: 2(-0.074,0.039)
  rect 2.54x0.864 smd: 2(2.466,0.039)
  silkscreen extent -1.85,-1.99 1.45,2.07, body extent -1.36,-2.26 2.89,2.34, height 1.59
"TEST 0.8" [mm] "测试点0.8mm"
  round 0.8 smd: 1(0,0)
"TEST 1" [mm] "盖绿油"
  round 1 smd paste-2539.97 mask+0: 1(0,0)
XTAL-3225-SMT-A [mm]
  rect 1.3x1.1 smd: 1(0.896,0.95) 2(-1.404,0.95) 3(-1.404,-0.95) 4(0.896,-0.95)
  silkscreen extent -1.85,-1.25 1.4,2.15
XTAL_FC-135$2F$3215 [mm] "32.768K"
  rect 1x1.8 smd: 1(-1.25,0) 2(1.25,0)
  silkscreen extent -2,-1.2 2,1.2
Z_QFN50P500X500X100-32N [mm] "SL2823"
  rect 0.25x0.7 smd: 1(0,0) 2(0.5,0) 3(1,0) 4(1.5,0) 5(2,0) 6(2.5,0) 7(3,0) 8(3.5,0) 17(3.5,5) 18(3,5) 19(2.5,5) 20(2,5) 21(1.5,5) 22(1,5) 23(0.5,5) 24(0,5)
  rect 0.7x0.25 smd: 9(4.25,0.75) 10(4.25,1.25) 11(4.25,1.75) 12(4.25,2.25) 13(4.25,2.75) 14(4.25,3.25) 15(4.25,3.75) 16(4.25,4.25) 25(-0.75,4.25) 26(-0.75,3.75) 27(-0.75,3.25) 28(-0.75,2.75) 29(-0.75,2.25) 30(-0.75,1.75) 31(-0.75,1.25) 32(-0.75,0.75)
  rect 2.2x2.2 smd paste-5 mask+0.102: 33(1.778,2.54)
  silkscreen extent -0.85,-1.15 4.3,5.05, body extent -0.8,-0.05 4.3,5.05, height 1

## Part data
ANT1: library part ANT
C1: library part C_TANTAL_D, "C_TANTAL_D"
C2 C6 C26 C27 C28 C32 C33: library part CAPC0603, "CAPC0603"
C3 C4 C5 C14 C15 C16 C21 C25 C29 C30 C31 C35 C38 C39 C42 C43 C44 C45 C47 C48 C51 C52 C53 C55 C56 C58 CE1: library part CAP, "Capacitor"
C7 C8 C9 C10 C11 C12 C13 C17 C18 C19 C20 C22 C24: library part CAPC0805, "CAPC0805"
C23: "Capacitor", LatestRevisionDate=17-Jul-2002, LatestRevisionNote="Re-released for DXP Platform.", PackageReference=RAD-0.3, Published=8-Jun-2000, Publisher="Altium Limited"
C34 C36 C37 C49 C50: library part C0402-0.8p, "Capacitor, NP0, ㊣5%", Footprint Doc=0402, LatestRevisionDate=2012-11-21, Note=50V, Part Number=C0402-0.8p, Pin Count=2, Published=2009-05-08, Publisher="Nordic Semiconductor"
C40 C41 C46 C54 C57: library part Cap, "Capacitor", LatestRevisionDate=17-Jul-2002, LatestRevisionNote="Re-released for DXP Platform.", PackageDescription="Radial Cap, Thru-Hole; 2 Leads; 0.3 in Pin Spacing", PackageReference=RAD-0.3, Published=8-Jun-2000, Publisher="Altium Limited"
D1: library part DIODE-S
J1 J2: library part CON4, "Connector"
J3: library part CON8
J4: library part "Header 7", "Header, 7-Pin", LatestRevisionDate=17-Jul-2002, LatestRevisionNote="Re-released for DXP Platform.", Publisher="Altium Limited"
J5 J7: library part CON2, "Connector"
J6 P1 P2 P3 P4 P5 P6 P7 P8 P9 P10 P11 P12: "Connector"
L1 L2 L6 L8 L9 L10: library part FB
L3 L4: library part INDC1812, "INDC1812"
L7 L11: library part L0402-3n9, "High frequency chip inductor ㊣5%", Footprint Doc=0402, LatestRevisionDate=2012-09-19, Part Number=L0402-3n9, Pin Count=2, Published=2009-05-08, Publisher="Nordic Semiconductor"
Q1 Q2 Q4: library part MOSFET-P
Q3: library part NPN
R1 R2 R3 R16 R17 R18 R19 R20 R21 R22 R23 R24 R25 R26 R27 R28 R29 R30 R31 R32 R33 R34 R35 R36 R37 R38 R39 R40: library part RES1
R4 R5 R8 R9 R10 R11 R12 R13 R14 R15: library part RESC0805, "RESC0805"
  R8 R9 R12 R13 R14: DNP=DNP
R6 R7: library part Res2, "0", LatestRevisionDate=17-Jul-2002, LatestRevisionNote="Re-released for DXP Platform.", PackageReference=AXIAL-0.4, Published=8-Jun-2000, Publisher="Altium Limited"
RN1 RN2 RN3: library part 8P4R-0603
TP1 TP2: library part TX, "Capacitor"
TVS2 TVS3: library part ESD
U1: library part SL2523, "SL2523", DNP=DNP
U3: library part VOLTREG_4P
U4: library part MX116L
VD1: library part RB521
X1 X2 Y1: library part CRYSTAL_4PIN
U5: Contributor=liaobin123, spicePre=U, spiceSymbolName="FR8018HA  QFN48"

## Via types
v1: diameter 0.4, hole 0.3, Top Layer 1 to Bottom Layer 1, tented both sides, 244 vias

## Nets (pads, with @x,y where several pads share a name; then routed paths per layer and width w, separated by ;. In a path a pad name is that pad's centre, name@x,y a point inside that pad or via, vN(x,y) a via of type N, cw(c..) or ccw(c..) an arc to the next point about the centre after c; other vN are vias at no path point)
3V3: C3.2 C4.2 C5.2 C21.2 C43.1 C44.1 C45.1 C46.2 C52.1 J6.1 J7.1 L2.1 L6.1 L9.2 Q4.2 R1.2 R2.2 R3.2 U2.1 U2.21 U3.3 U5.20 | length 150.2
  Top Layer 1 w0.3: Q4.2@3.932,24.765 v1(5.969,24.765) ; L9.2@5.337,18.034 5.337,18.002 v1(6.604,16.735) ; v1(29.657,28.826) 29.657,27.69 34.525,22.822 R1.2@34.525,17.118 ; L2.1@30.102,39.751 30.102,39.719 30.352,39.469 30.673,39.469 32.476,37.666 J7.1@36.205,37.666 ; v1@32.557,13.858 33.351,13.858 33.355,13.862 33.539,13.862 R3.2@33.659,13.982 R2.2@33.659,15.125 ; v1(33.659,16.777) 33.686,16.777 33.982,17.072 34.479,17.072 R1.2@34.525,17.118 ; U2.21@36.335,16.125 35.556,16.125 35.38,16.301 35.38,16.942 35.204,17.118 R1.2@34.525,17.118 ; v1(36.576,35.814) 36.576,35.841 36.205,36.212 J7.1@36.205,37.666 ; v1(37.084,40.513) 36.205,39.634 J7.1@36.205,37.666 ; C3.2@37.085,12.065 U2.1@37.085,13.875 ; v1(51.435,29.789) U5.20@51.434,30.472 ; U5.20@51.434,30.472 C44.1@51.435,37.318 ; v1(62.23,16.383) 62.257,16.383 62.511,16.637 L6.1@63.816,16.637
  Top Layer 1 w0.5: U3.3@25.654,13.97 C21.2@27.083,13.97 C52.1@28.321,13.97 29.72,13.97 31.244,12.446 32.776,12.446 33.659,13.33 ; R3.2@33.659,13.982 33.659,13.33 ; C3.2@37.085,12.065 C4.2@35.942,12.065 C5.2@34.799,12.065 34.779,12.085 34.779,12.21 33.659,13.33 ; J6.1@43.21,41.402 43.21,40.044 43.503,39.751 50.038,39.751 50.748,39.041 50.748,37.935 50.7,37.887
  layer1 w0.3: v1(5.969,24.765) 5.969,17.37 v1(6.604,16.735) ; v1(29.657,28.826) 31.945,31.115 33.02,31.115 36.576,34.671 v1(36.576,35.814) ; v1(32.53,13.858) 33.659,14.987 v1(33.659,16.777)
  layer2 w0.3: v1(6.604,16.735) 7.395,17.526 8.128,17.526 9.621,16.033 32.916,16.033 v1(33.659,16.777) ; v1(51.435,29.789) 52.141,29.083 54.737,29.083 56.603,27.217 56.603,25.897 56.053,25.348 56.053,18.311 57.981,16.383 v1(62.23,16.383)
  Bottom Layer 1 w0.3: v1(37.084,40.513) 37.973,41.402 J6.1@43.21,41.402
3V3_SW: C38.2 C39.1 C53.1 J3.4 L1.1 Q4.3 | length 115.4
  Top Layer 1 w0.4: Q4.3@2.982,27.235 C53.1@2.982,28.575 v1(2.982,30.3) ; L1.1@30.102,41.151 30.102,41.142 30.302,40.942 30.773,40.942 31.209,40.506 31.696,40.506 31.766,40.436 C38.2@31.766,40.349 31.766,39.304 32.716,38.354 34.915,38.354 35.306,38.745 35.306,39.878 v1(36.322,40.894) ; C39.1@64.083,12.723 v1(65.174,12.723) 65.974,13.523 J3.4@67.171,13.523
  layer1 w0.4: v1(36.322,40.894) 36.83,41.402 40.513,41.402 41.91,40.005 62.865,40.005 64.643,38.227 64.643,13.254 v1(65.174,12.723)
  layer2 w0.4: v1(2.982,30.3) 2.982,39.431 5.08,41.529 35.687,41.529 v1(36.322,40.894)
6V_SW: C25.1 C48.1 L8.1 Q2.3 R38.1 R40.1 U4.5 | length 43.8
  Top Layer 1 w0.5: L8.1@0.886,18.034 0.886,19.05 1.179,19.343 1.855,19.343 1.905,19.393 Q2.3@1.905,19.466 R40.1@4.212,19.466 5.588,19.466 ; R38.1@5.588,20.701 5.588,19.466 ; v1(8.622,13.081) 8.622,16.529 6.604,18.547 C48.1@6.604,19.466 5.588,19.466 ; v1(29.464,13.081) 29.464,12.749 33.528,8.685 C25.1@33.528,8.56 U4.5@34.919,8.56
  Bottom Layer 1 w0.5: v1(8.622,13.081) v1(29.464,13.081)
ADC: C56.1 R38.2 R39.1 U5.26 | length 55.9
  Top Layer 1 w0.2: U5.26@49.134,29.372 v1(49.796,29.372)
  Top Layer 1 w0.3: C56.1@5.337,21.936 R39.1@6.454,21.936 ; R38.2@6.454,20.701 R39.1@6.454,21.936 ; v1(6.604,25.654) 7.389,24.869 7.389,22.112 7.214,21.936 R39.1@6.454,21.936
  layer2 w0.3: v1(6.604,25.654) 15.24,25.654 18.288,22.606 21.336,22.606 24.333,25.603 40.17,25.603 43.18,28.614 v1(43.18,29.591)
  Bottom Layer 1 w0.2: v1(43.18,29.591) 49.577,29.591 v1(49.796,29.372)
CLEAR: C55.1 J7.2 U5.32 | length 19.3
  Top Layer 1 w0.2: 46.501,26.572 47.968,26.572 48.368,26.972 U5.32@49.134,26.972
  Top Layer 1 w0.3: J7.2@37.455,37.666 38.369,37.666 38.572,37.464 C55.1@38.697,37.464 38.697,34.674 42.193,31.178 42.193,29.019 43.965,27.247 45.826,27.247 46.501,26.572
DVDD: C1.1 C2.2 C26.2 C27.2 C28.2 D1.1 L1.2 L2.2 R9.1 R14.1 R16.1 U1.2 U1.3 U1.9 U1.12 U1.15 | length 30.6
  Top Layer 1 w0.3: C27.2@19.304,30.111 21.346,30.111 v1(21.677,29.78) 21.446,29.549 21.446,28.686 21.379,28.619 ; U1.15@20.515,27.111 21.027,27.111 21.379,27.463 21.379,28.619 ; U1.12@20.515,28.611 21.371,28.611 21.379,28.619 ; D1.1@20.955,34.608 v1(21.595,34.608) 23.004,34.608 ; U1.2@24.265,30.861 R9.1@24.265,32.385 R14.1@23.131,32.385 R16.1@23.131,33.524 23.122,33.533 23.122,36.314 C26.2@23.114,36.322 C28.2@23.114,37.56 23.218,37.664 23.711,37.664 25.038,38.991 25.038,39.528 25.261,39.751 C2.2@26.995,39.751 L2.2@28.702,39.751 L1.2@28.702,41.151
  layer2 w0.3: v1(21.595,34.608) 22.662,33.542 22.662,30.765 v1(21.677,29.78)
EA: R8.2 U1.32 | length 1.4
  Top Layer 1 w0.3: U1.32@25.515,30.111 26.742,30.111 26.885,30.254 R8.2@26.898,30.254
EXIO: R18.1 U5.37 | length 62.3
  Top Layer 1 w0.254: v1(39.956,26.309) 41.593,24.672 U5.37@49.834,24.672
  Top Layer 1 w0.3: R18.1@1.039,16.256 v1(1.039,16.914)
  layer2 w0.3: v1(1.039,16.914) 1.039,21.44 0.508,21.971 0.508,24.257 3.429,27.178 15.074,27.178 18.928,23.324 21.038,23.324 23.934,26.22 39.841,26.22 39.929,26.309 v1(39.956,26.309)
F_VCC: J3.6 L6.2 L10.2 | length 3.4
  Top Layer 1 w0.4: L6.2@65.216,16.637 L10.2@65.216,15.24 65.308,15.148 67.146,15.148 J3.6@67.171,15.123
FP_IRQ: R22.1 R24.1 U5.5 | length 22.5
  Top Layer 1 w0.2: U5.5@54.934,26.972 55.606,26.972 55.608,26.974 56.061,26.974 56.463,26.572 61.947,26.572 v1(62.23,26.289) ; R24.1@62.766,13.97 v1(63.425,13.97) R22.1@64.083,13.97
  layer2 w0.2: v1(62.23,26.289) 64.366,24.153 64.366,18.646 63.425,17.705 v1(63.425,13.97)
FR: C34.2 L7.1 U5.9 | length 9.3
  Top Layer 1 w0.2: U5.9@54.934,28.572 56.096,28.572 56.896,27.772 61.426,27.772 62.101,28.447 C34.2@62.101,28.572 L7.1@63.473,28.572
GND: ANT1.1 C1.2 C2.1 C3.1 C4.1 C5.1 C6.2 C10.1 C11.1 C12.1 C13.1 C14.1 C15.2 C16.2 C17.2 C18.2 C19.2 C20.2 C21.1 C23.1 C25.2 C26.1 C27.1 C28.1 C29.2 C30.2 C32.1 C33.1 C34.1 C35.2 C36.2 C37.2 C38.1 C39.2 C40.1 C41.1 C42.2 C43.2 C44.2 C45.2 C46.1 C47.2 C48.2 C49.1 C50.1 C51.2 C52.2 C53.2 C54.1 C55.2 C56.2 C57.1 C58.2 J1.2 J1.3 J2.3 J3.1 J3.7 J3.8 J4.2 J5.3 J6.4 J7.3 Q3.2 R8.1 R12.1 R13.1 R17.1 R24.2 R26.2 R27.2 R33.2 R39.2 TVS3.1 U1.4 U1.5 U1.7 U1.10 U1.14 U1.18 U1.19 U1.20 U1.28 U1.33 U2.17 U2.25 U3.1 U4.2 U5.10 U5.49 X1.2 X1.4 Y1.2 Y1.4 | length 24.5
  Top Layer 1 w0.2: U2.17@37.585,17.875 37.585,16.646 v1(37.592,16.639)
  Top Layer 1 w0.5: v1@62.357,1.427 65.689,1.427 68.967,4.705 68.967,5.328 68.961,5.334 68.967,5.34 J3.8@68.967,9.973 ; v1(63.038,32.072) ANT1.1@64.516,32.072 ; J3.1@67.171,11.123 67.5,11.123 68.4,10.223 68.717,10.223 J3.8@68.967,9.973 ; J3.7@68.967,16.273 J3.8@68.967,9.973
  other v1: 53.34,0.731 63.871,0.915 62.669,0.953 59.817,1.397 62.357,1.397 55.056,1.427 57.603,1.427 63.058,1.427 63.679,1.535 29.436,1.725 7.874,1.905 9.603,1.905 12.674,1.905 14.101,1.905 44.674,1.905 46.766,1.905 48.387,1.905 50.673,1.905 18.923,2.032 20.154,2.032 34.798,2.032 35.814,2.286 30.607,2.413 37.245,2.54 54.102,2.554 21.417,2.794 54.102,4.126 54.102,5.588 54.102,6.941 54.102,8.56 54.102,10.132 60.823,12.319 58.42,12.7 55.604,12.827 0.605,13.153 1.191,13.468 59.083,13.611 0.584,13.938 60.325,14.302 1.177,14.351 54.662,14.468 58.193,14.468 37.592,16.118 38.354,16.118 39.243,16.118 38.354,16.639 39.243,16.639 0.762,25.452 0.762,26.213 42.418,26.846 0.762,26.927 39.043,27.305 40.745,27.299 1.407,27.432 23.604,27.443 22.662,27.717 0.762,27.922 22.352,28.321 23.604,28.321 58.193,28.391 59.145,28.572 57.551,28.699 30.385,28.72 37.592,28.829 39.056,28.829 40.314,28.829 22.352,28.956 23.393,28.956 59.256,29.372 20.899,29.611 24.679,29.991 43.717,30.101 45.014,30.11 44.35,30.119 32.385,30.607 33.528,30.607 39.148,30.864 40.21,30.864 0.762,30.904 28.966,31.036 36.83,31.115 30.016,31.184 30.815,31.496 20.182,31.649 20.766,31.64 21.467,31.677 1.27,32.385 37.592,32.558 1.016,33.528 37.846,34.671 0.942,34.798 37.592,36.045 0.942,37.211 1.524,39.497 37.886,40.407 2.413,40.767 38.535,40.812 57.785,41.148 61.136,41.148 55.393,41.402
I2C: R9.2 U1.1 | length 1.7
  Top Layer 1 w0.3: U1.1@24.765,30.861 24.765,31.036 25.131,31.402 R9.2@25.131,32.385
IO_ON: R23.2 U5.34 | length 50.8
  Top Layer 1 w0.2: v1(41.783,26.162) 41.793,26.172 U5.34@49.134,26.172
  Top Layer 1 w0.3: R23.2@5.078,16.637 5.091,16.637 5.853,15.875 6.712,15.875 v1(7.366,16.529)
  layer2 w0.3: v1(7.366,16.529) 8.42,15.474 33.369,15.474 36.322,18.428 36.322,20.701 v1(41.783,26.162)
LED-0: R31.1 U5.45 | length 12
  Top Layer 1 w0.2: U5.45@53.034,24.672 53.034,23.323 52.832,23.121 52.832,21.438 52.949,21.321 54.752,21.321 55.499,20.574 55.499,19.304 57.023,17.78 R31.1@59.234,17.78
LED-1: R37.1 U5.41 | length 51.6
  Top Layer 1 w0.2: v1(51.434,21.564) U5.41@51.434,24.672
  Top Layer 1 w0.3: R37.1@12.975,17.78 15.367,17.78 16.611,19.024 v1(18.669,19.024)
  layer1 w0.3: v1(36.576,24.765) 36.576,20.828 40.132,17.272 46.863,17.272 51.136,21.545 51.415,21.545 v1(51.434,21.564)
  layer2 w0.3: v1(18.669,19.024) 24.41,24.765 v1(36.576,24.765)
LED-4: R36.1 U5.40 | length 29.1
  Top Layer 1 w0.2: v1(50.976,23.597) 50.976,23.651 51.034,23.709 U5.40@51.034,24.672
  Top Layer 1 w0.3: R36.1@28.966,32.385 31.436,32.385 32.657,33.606 38.892,33.606 41.603,30.895 41.603,28.655 43.587,26.671 v1(45.376,26.671)
  layer2 w0.3: v1(45.376,26.671) 48.451,23.597 v1(50.976,23.597)
LED-5: R35.1 U5.39 | length 38.2
  Top Layer 1 w0.2: v1(50.38,25.461) 50.38,25.407 50.634,25.153 U5.39@50.634,24.672
  Top Layer 1 w0.3: v1(28.966,16.625) R35.1@28.966,17.78
  layer1 w0.2: v1(28.966,16.625) 29.97,15.621 32.639,15.621 33.136,16.118 33.136,18.206 34.29,19.36 34.29,27.326 v1(33.528,28.088) ; v1(41.22,27.813) 43.271,27.813 44.109,28.651 46.279,28.651 49.469,25.461 v1(50.38,25.461)
  layer2 w0.2: v1(33.528,28.088) 40.945,28.088 v1(41.22,27.813)
LED-7: R34.1 U5.38 | length 10.4
  Top Layer 1 w0.2: 50.234,20.757 U5.38@50.234,24.672
  Top Layer 1 w0.3: R34.1@44.966,17.78 47.257,17.78 50.234,20.757
LED-#: R29.1 U5.46 | length 1.9
  Top Layer 1 w0.2: R29.1@53.434,22.768 U5.46@53.434,24.672
LED-*: R32.1 U5.44 | length 27.9
  Top Layer 1 w0.2: U5.44@52.634,24.672 52.634,23.549 52.396,23.312 52.396,21.312 52.753,20.955 54.52,20.955 54.935,20.54 54.935,19.106 56.603,17.438 56.603,10.07 55.245,8.712 55.245,4.788 56.731,3.302 R32.1@59.234,3.302
M0: J2.2 TVS2.2 U4.6 | length 3.4
  Top Layer 1 w0.5: U4.6@34.919,7.61 35.189,7.61 35.523,7.276 TVS2.2@35.523,6.223 35.503,6.223 35.483,6.203 35.483,4.665 J2.2@35.443,4.625
M1: J2.1 TVS2.1 U4.1 | length 3.4
  Top Layer 1 w0.5: J2.1@36.693,4.625 36.653,4.665 36.653,6.203 36.633,6.223 TVS2.1@36.613,6.223 36.613,7.276 36.947,7.61 U4.1@37.217,7.61
MOTO: U4.4 U5.48 | length 30.2
  Top Layer 1 w0.2: U4.4@34.919,9.51 v1(35.942,9.51) ; v1(51.308,20.447) v1(54.236,20.447) ; U5.48@54.234,24.672 54.234,24.372 54.241,24.372 54.52,24.093 54.52,23.052 v1(54.236,22.768)
  Bottom Layer 1 w0.2: v1(35.942,9.51) 38.33,11.898 46.061,11.898 51.308,17.145 v1(51.308,20.447) ; v1(54.236,20.447) v1(54.236,22.768)
MT_EN: U4.3 U5.47 | length 28.4
  Top Layer 1 w0.2: U4.3@37.217,9.51 v1(38.085,9.51) ; v1(51.816,19.812) v1(53.834,19.812) ; U5.47@53.834,24.672 53.834,23.772 53.966,23.641 v1(53.966,23.587)
  Bottom Layer 1 w0.2: v1(38.085,9.51) 38.085,10.911 38.667,11.494 46.46,11.494 51.816,16.849 v1(51.816,19.812) ; v1(53.834,19.812) 53.834,23.401 53.966,23.532 v1(53.966,23.587)
N0: P10.1 RN3.6 | length 9.3
  Top Layer 1 w0.2: RN3.6@38.335,23.318 38.335,31.096 39.411,32.172 v1(39.435,32.172)
N1: P3.1 RN1.5 | length 5.6
  Top Layer 1 w0.2: RN1.5@43.137,10.414 48.278,10.414 48.623,10.07 v1(48.641,10.07)
N2: P4.1 RN1.6 | length 12.9
  Top Layer 1 w0.2: RN1.6@43.137,11.039 54.634,11.039 v1(55.603,10.07)
N3: P2.1 RN1.7 | length 15.2
  Top Layer 1 w0.2: RN1.7@43.137,11.539 44.178,11.539 44.407,11.768 44.407,11.968 44.704,12.265 v1(44.704,12.319)
  Bottom Layer 1 w0.2: P2.1@32.512,10.033 34.036,11.557 37.332,11.557 38.094,12.319 v1(44.704,12.319)
N4: P1.1 RN1.8 | length 28.5
  Top Layer 1 w0.2: v1(43.083,12.954) 43.083,12.218 RN1.8@43.137,12.164
  Bottom Layer 1 w0.2: P1.1@16.637,10.07 18.505,11.938 36.703,11.938 37.719,12.954 v1(43.083,12.954)
N5: P5.1 RN2.5 | length 37.8
  Top Layer 1 w0.2: v1(14.351,13.716) 14.351,15.794 v1(16.591,18.034) ; RN2.5@45,14.238 45.085,14.153 v1(45.085,13.462)
  Bottom Layer 1 w0.2: v1(14.351,13.716) 29.591,13.716 30.394,12.913 36.027,12.913 37.084,13.97 44.577,13.97 v1(45.085,13.462)
N6: P6.1 RN2.6 | length 21.8
  Top Layer 1 w0.2: v1(31.149,13.589) 31.149,16.568 v1(32.639,18.058) ; RN2.6@45,14.863 45.002,14.861 46.099,14.861 v1(46.101,14.859)
  Bottom Layer 1 w0.2: v1(31.149,13.589) 31.203,13.589 31.404,13.388 35.749,13.388 37.219,14.859 v1(46.101,14.859)
N7: P8.1 RN2.7 | length 11.4
  Top Layer 1 w0.2: RN2.7@45,15.363 46.836,15.363 48.119,16.646 49.135,17.662 v1(55.439,17.662)
N8: P7.1 RN2.8 | length 4.4
  Top Layer 1 w0.2: RN2.8@45,15.988 46.672,15.988 v1(48.591,17.907)
N9: P9.1 RN3.5 | length 22.4
  Top Layer 1 w0.2: RN3.5@38.96,23.318 38.96,26.309 v1(39.956,27.305)
  Bottom Layer 1 w0.2: v1(39.956,27.305) 43.258,30.607 54.102,30.607 P9.1@55.88,32.385
N#: P11.1 RN3.7 | length 11.4
  Top Layer 1 w0.2: v1(32.639,32.558) 37.835,27.362 RN3.7@37.835,23.318